# Altium PCB Morpheus_middle.PcbDoc (part 2 of 3)
Units mm, origin at the board's own origin, x right, y up, seen from the top; angles counter-clockwise.
Board outline 54.01 x 53.97 mm, 6 copper layers (Top Layer, Signal Layer 1, Signal Layer 2, GND, PWR, Bottom Layer), stack 0.657 mm thick; 151 components, 110 nets, 517 pads, 447 vias.
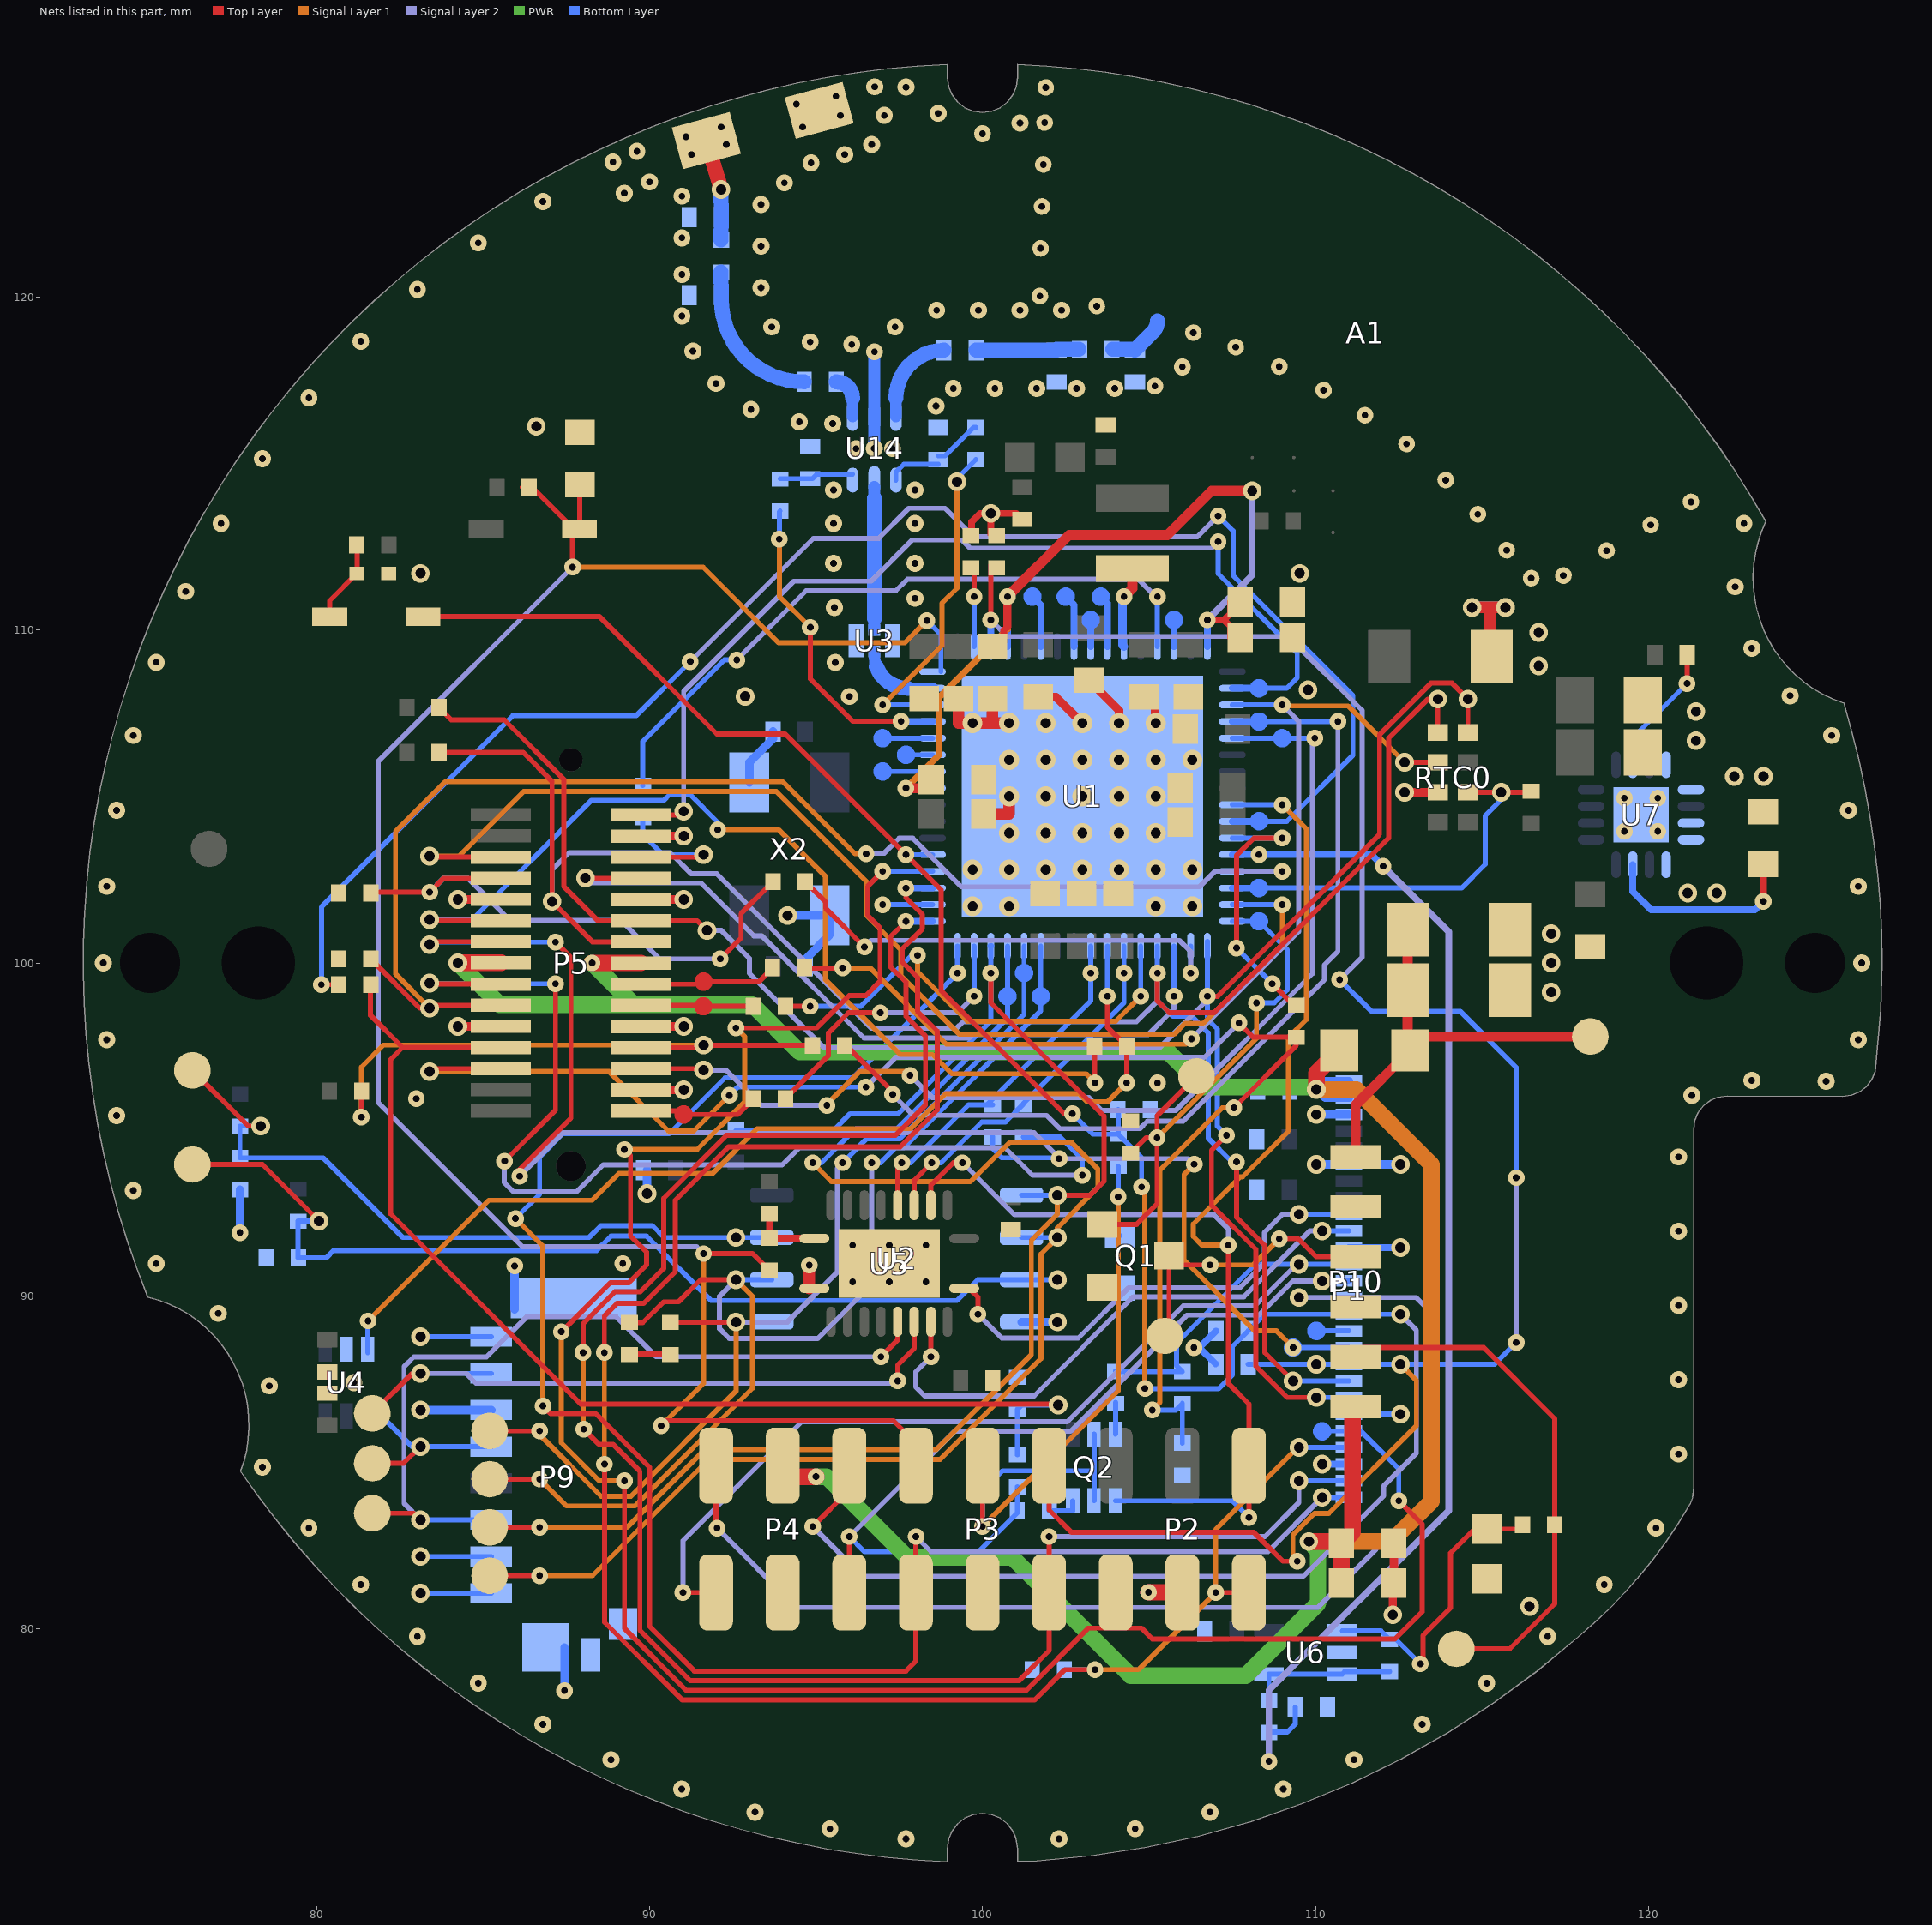
[diagram p6: the nets of this part, all layers, seen from the top]

## Via types
v1: diameter 0.559, hole 0.305, Top Layer to Bottom Layer, 105 vias
v2: diameter 0.5, hole 0.2, Top Layer to Bottom Layer, 104 vias
v3: diameter 0.5, hole 0.2, Top Layer to Bottom Layer, tented both sides, 66 vias
v4: diameter 0.51, hole 0.2, Top Layer to Bottom Layer, tented both sides, 64 vias
v5: diameter 0.51, hole 0.2, Top Layer to Bottom Layer, 58 vias
v6: diameter 0.6, hole 0.3, Top Layer to Bottom Layer, 33 vias
v7: diameter 0.559, hole 0.305, Top Layer to Bottom Layer, tented both sides, 16 vias
v8: diameter 0.559, hole 0.305, Top Layer to Bottom Layer, tented bottom, 1 vias

## Nets (pads, with @x,y where several pads share a name; then routed paths per layer and width w, separated by ;. In a path a pad name is that pad's centre, name@x,y a point inside that pad or via, vN(x,y) a via of type N, cw(c..) or ccw(c..) an arc to the next point about the centre after c; other vN are vias at no path point) (continued)
5V: C5.2 C6.2 C30.1 P1.1 P1.2 P4.4 P5.15 P5.16 P10.6 R8.2 | length 83.1
  Top Layer w0.5: v1(84.25,100.002) P5.16@85.54,100.002 ; v2(88.275,100) P5.15@89.74,100 ; P4.4@94,84.905 94.33,84.575 v3(95,84.575) ; v7(109.8,82.625) 110.732,82.625 C6.2@110.777,82.58 ; v1(110.025,96.2) 110.025,96.692 R8.2@110.708,97.375 ; C5.2@110.777,81.38 C6.2@110.777,82.58 ; P10.6@111.2,86.675 111.2,86.517 111.115,86.431 111.115,82.917 C6.2@110.777,82.58
  PWR w0.5: v1(84.25,100.002) 85.502,98.75 89.525,98.75 ; v2(88.275,100) 89.525,98.75 ; v3(95,84.575) 95.316,84.575 97.741,82.15 100.891,82.15 104.441,78.6 107.909,78.6 110.075,80.766 110.075,82.35 v7(109.8,82.625) ; v1(110.025,96.2) 109.95,96.275 106.631,96.275 105.581,97.325 94.51,97.325 93.085,98.75 89.525,98.75
  Signal Layer 1 w0.5: v7(109.8,82.625) 112.271,82.625 113.479,83.833 113.479,93.946 111.225,96.2 v1(110.025,96.2)
  Bottom Layer w0.25: C30.1@109.125,96.2 v1(110.025,96.2) ; P1.2@111,95.95 110.295,95.95 110.045,96.2 v1(110.025,96.2) ; P1.1@111,96.45 110.275,96.45 v1(110.025,96.2)
ANA2_SW: U1.46 | length 1.4
  Bottom Layer w0.2: U1.46@105.75,109.5 105.75,110.3
  Bottom Layer w0.35: 105.85,110.3 ccw(c105.75,110.3) 105.85,110.3
ANT_DIV_CTL1: C58.2 R58.2 U14.6 | length 2.2
  Bottom Layer w0.15: R58.2@93.925,114.542 C58.2@94.825,114.542 94.892,114.542 95.025,114.675 U14.6@96.1,114.675
ANT_DIV_CTL2: C59.2 R59.2 U14.4 | length 3.1
  Bottom Layer w0.15: U14.4@97.4,114.5 97.4,114.74 97.636,114.975 C59.2@98.675,114.975 ; C59.2@98.675,115.225 98.875,115.225 99.733,116.083 R59.2@99.8,116.083
CC_3200_PIN18: U1.18 | length 1.5
  Bottom Layer w0.15: v2(97,101.75) U1.18@98.5,101.75
CCU_ANT1: R58.1 U1.29 | length 9.6
  Top Layer w0.15: v3(94.83,110.08) 94.83,108.531 96.105,107.255 v2(97.555,107.255)
  Signal Layer 1 w0.15: v3(93.9,112.725) 93.9,111.01 v3(94.83,110.08)
  Bottom Layer w0.15: v3(93.9,112.725) 93.9,113.542 R58.1@93.925,113.567
  Bottom Layer w0.2: v2(97.555,107.255) 97.56,107.25 U1.29@98.5,107.25
CCU_ANT2: R59.1 U1.30 | length 10
  Signal Layer 1 w0.15: v2(97,107.75) 98.78,109.53 98.78,110.8 99.233,111.253 v1(99.233,114.45)
  Bottom Layer w0.15: v2(97,107.75) U1.30@98.5,107.75 ; v1(99.233,114.45) 99.233,114.55 R59.1@99.8,115.117
CCU_CLK: P5.20 R4.1 | length 30.3
  Top Layer w0.15: v1(83.4,101.3) 83.428,101.272 P5.20@85.54,101.272 ; v2@103.375,96.41 R4.1@103.375,97.502
  Signal Layer 1 w0.15: v2(92.05,104) 93.885,104 95.275,102.61 95.275,99.502 97.527,97.25 98.5,97.25 99.079,96.671 103.113,96.671 v2(103.38,96.405)
  Bottom Layer w0.15: v1(83.4,101.3) 84.671,101.3 88.256,104.885 90.435,104.885 90.594,105.044 91.23,105.044 92.05,104.224 v2(92.05,104)
CCU_CMD: P1.17 P5.18 R3.1 | length 47.2
  Top Layer w0.15: v1(83.4,100.55) 83.487,100.637 P5.18@85.54,100.637 ; v2(86.103,93.597) 86.103,93.803 87.64,95.34 87.64,100.16 v2(87.175,100.625)
  Signal Layer 1 w0.15: v2(106.355,93.955) 106.355,93.953 106.05,93.648 106.05,91.079 108.179,88.95 108.827,88.95 109.327,88.45 v2(109.325,88.45)
  Signal Layer 2 w0.15: v2(86.103,93.597) 87.405,94.9 101.55,94.9 102.3,94.15 v3(102.3,94.125) 106.185,94.125 v2(106.355,93.955)
  Bottom Layer w0.15: v1(83.4,100.55) 83.475,100.625 v2(87.175,100.625) ; R3.1@100.3,94.783 100.3,94.431 100.581,94.15 102.275,94.15 v3(102.3,94.125) ; v2(109.325,88.45) 109.425,88.45 P1.17@111,88.45
  Bottom Layer w0.35: v2@109.425,88.45 ccw(c109.325,88.45) v2@109.425,88.45
CCU_DAT: P5.14 R2.1 | length 33.4
  Top Layer w0.15: v1(83.4,99.395) 83.428,99.367 P5.14@85.54,99.367 ; v2(85.65,94.05) 87.175,95.575 v2(87.175,99.375)
  Signal Layer 2 w0.15: v2(85.65,94.05) 85.638,94.038 85.638,93.405 85.91,93.132 87.813,93.132 88.615,93.935 93.985,93.935 94.5,94.45 100.675,94.45 101.5,93.625 v3(103,93.625)
  Bottom Layer w0.15: v1(83.4,99.395) 83.42,99.375 v2(87.175,99.375) ; R2.1@101.225,94.775 102.333,94.775 103,94.108 v3(103,93.625)
CCU_RXD: P5.6 R27.2 R62.1 R63.2 | length 45.8
  Top Layer w0.15: v1(83.4,96.74) 83.487,96.827 P5.6@85.54,96.827 ; v2(107.55,95.65) 109.425,97.525 R27.2@109.425,97.767 109.425,97.775 108.125,97.775 v2(107.7,98.2)
  Signal Layer 1 w0.15: v1(83.4,96.74) 88.785,96.74 90.569,94.956 91.331,94.956 v2(92.4,96.025) ; v3(105.1,86.575) 105.325,86.8 105.325,93.778 107.197,95.65 v2(107.55,95.65)
  Signal Layer 2 w0.15: v2(96.5,96.275) 97.39,97.165 106.665,97.165 v2(107.7,98.2)
  Bottom Layer w0.15: v2(92.4,96.025) 92.65,96.275 v2(96.5,96.275) ; v3(105.1,86.575) 105.808,86.575 R62.1@106,86.767 ; R63.2@106,85.575 R62.1@106,86.767 ; R62.1@106,86.775 R62.1@106,86.767
CCU_TXD: P5.8 R64.1 R65.2 R70.2 | length 35.5
  Top Layer w0.15: R70.2@81.625,99.35 81.625,98.425 82.588,97.462 ; P5.8@85.54,97.462 82.588,97.462 ; v7(102.275,86.725) 102.245,86.755 87.937,86.755 82.225,92.467 82.225,97.099 82.588,97.462
  Bottom Layer w0.15: R64.1@101.05,85.225 R65.2@101.05,86.6 ; R65.2@101.05,86.592 101.183,86.725 v7(102.275,86.725)
DCDC_ANA_SW: U1.38 | length 2.2
  Bottom Layer w0.2: 101.5,111 101.75,110.75 U1.38@101.75,109.5
  Bottom Layer w0.35: 101.6,111 ccw(c101.5,111) 101.6,111
DCDC_DIG_SW: L3.2 U1.43 | length 2.5
  Top Layer w0.3: v2(104.25,111) 104.5,111.25 L3.2@104.5,111.85
  Bottom Layer w0.254: U1.43@104.25,109.5 104.204,109.546 104.204,110.954 v2(104.25,111)
DCDC_PA_OUT: U1.42 | length 2.2
  Bottom Layer w0.2: 103.55,111 103.75,110.8 U1.42@103.75,109.5
  Bottom Layer w0.35: 103.65,111 ccw(c103.55,111) 103.65,111
DCDC_PA_SW_N: U1.41 | length 1.4
  Bottom Layer w0.2: U1.41@103.25,109.5 103.25,110.25 103.3,110.3
  Bottom Layer w0.35: 103.35,110.3 ccw(c103.25,110.3) 103.35,110.3
DCDC_PA_SW_P: U1.40 | length 2.3
  Bottom Layer w0.2: 102.5,111 102.75,110.75 U1.40@102.75,109.5 U1.40@102.769,109.519
  Bottom Layer w0.35: 102.6,111 ccw(c102.5,111) 102.6,111
DUST_LED: P10.3 Q1.3 TP2.1 | length 8.7
  Top Layer w0.15: TP2.1@105.475,88.8 105.6,88.925 Q1.3@105.6,91.2 105.868,90.932 v3(106.833,90.932) ; v2(108.911,91.718) 109.482,91.718 110.025,91.175 P10.3@111.2,91.175
  Signal Layer 1 w0.15: v3(106.833,90.932) 108.126,90.932 v2(108.911,91.718)
DUST_OPAMP_IN+: R10.1 R11.2 R15.1 U6.1 | length 9
  Top Layer w0.15: v3(113.15,78.95) 113.225,79.025 113.225,79.803 114.056,80.634 114.056,82.281 114.774,82.999 R10.1@115.15,82.999 116.092,82.999 R11.2@116.217,83.125
  Bottom Layer w0.15: U6.1@110.8,79.943 111.966,79.943 R15.1@112.226,79.683 112.417,79.683 v3(113.15,78.95)
DUST_OPAMP_IN-: R15.2 R19.1 U6.3 U6.4 | length 4.4
  Bottom Layer w0.15: R19.1@108.6,77.858 108.6,78.642 U6.3@110.8,78.643 110.875,78.717 R15.2@112.226,78.717
DUST_OUTPUT: P10.5 R11.1 TP1.1 | length 16.1
  Top Layer w0.15: P10.5@111.2,88.175 111.475,88.45 115.05,88.45 117.183,86.317 R11.1@117.183,83.125 117.183,80.755 115.828,79.4 TP1.1@114.225,79.4
DUST_PWM: Q1.1 R80.2 TP9.1 U1.64 | length 17.4
  Top Layer w0.15: Q1.1@103.6,92.15 104.625,92.15 105.238,92.763 v2(105.238,94.75) ; R80.2@104.45,94.292 104.908,94.75 v2(105.238,94.75) ; TP9.1@106.425,96.6 105.238,95.413 v2(105.238,94.75)
  Signal Layer 1 w0.15: v2(105.238,94.75) 108.225,97.737 v2(108.225,98.801)
  Bottom Layer w0.15: U1.64@107.5,101.25 108.3,101.25 109.15,100.4 109.15,99.189 108.762,98.801 v2(108.225,98.801)
  Bottom Layer w0.35: 108.4,101.25 ccw(c108.3,101.25) 108.4,101.25
DUST_SENSE: C11.2 R19.2 U1.60 | length 36.9
  Signal Layer 2 w0.2: v3(108.6,76.025) 108.6,78.155 114,83.555 114,100.935 v2(112.03,102.905)
  Bottom Layer w0.15: v3(108.6,76.025) R19.2@108.6,76.892 108.608,76.9 109.15,76.9 109.392,77.142 C11.2@109.392,77.65
  Bottom Layer w0.2: U1.60@107.5,103.25 v2(108.3,103.25) 111.685,103.25 v2(112.03,102.905)
DUST_VLED: C2.2 C28.2 P10.1 R8.1 TP5.1 | length 13.2
  Top Layer w0.3: P10.1@111.2,94.175 111.2,95.733 R8.1@112.842,97.375 R8.1@112.763,97.454 ; C28.2@112.763,101 C2.2@112.763,99.182 R8.1@112.763,97.454 ; TP5.1@118.25,97.792 113.102,97.792 R8.1@112.763,97.454
EIFA_SIG1: C8.2 C46.1 R26.1 | length 4.7
  Bottom Layer w0.45: R26.1@92.15,120.742 C46.1@92.158,120.05 92.158,119.935 ccw(c94.642,119.935) C8.2@94.642,117.45
EIFA_SIG2: A2.1 C47.1 R26.2 | length 3.1
  Top Layer w0.45: A2.1@91.71,124.697 v1(92.15,123.225)
  Bottom Layer w0.45: R26.2@92.15,121.708 C47.1@92.158,122.4 v1(92.15,123.225)
  other v4: 91.262,124.275 92.306,124.575 91.1,124.813 92.15,125.1
EN_SIO: C61.1 P3.4 Q2.2 Q2.5 R61.2 | length 22.2
  Top Layer w0.15: v3(100,83.075) P3.4@100,84.905
  Signal Layer 1 w0.15: v3(100,83.075) 104.075,87.15 v3(104.075,92.975)
  Bottom Layer w0.15: v3(100,83.075) 100,84.15 100.6,84.75 103.35,84.75 ; Q2.2@103.35,83.85 Q2.5@103.35,85.85 ; R61.2@104.075,93.892 v3(104.075,92.975) 104.075,91.862 C61.1@104.125,91.812
FFC_USB_RXD: P1.10 U5.18 | length 17.2
  Top Layer w0.15: v3(98.45,88.175) U5.18@98.45,89.075
  Signal Layer 2 w0.15: v3(98.45,88.175) 98,87.725 98,87.264 98.264,87 101.553,87 104.528,89.975 107.847,89.975 109.822,91.95 v1(110.2,91.95)
  Bottom Layer w0.15: v1(110.2,91.95) P1.10@111,91.95
FFC_USB_TXD: P1.9 U5.20 | length 14.4
  Top Layer w0.15: U5.20@99.6,90.225 99.863,89.962 v3(99.863,89.45)
  Signal Layer 2 w0.15: v3(99.863,89.45) 100.577,88.736 102.878,88.736 104.392,90.25 107.733,90.25 108.461,90.978 108.461,91.904 109.007,92.45 v1(109.5,92.45)
  Bottom Layer w0.15: v1(109.5,92.45) P1.9@111,92.45
FLASH_RESET: R24.2 R25.1 TP15.1 U2.7 | length 21.6
  Top Layer w0.15: TP15.1@76.275,96.775 77.95,95.1 v1(78.325,95.1)
  Bottom Layer w0.15: v1(78.325,95.1) 77.7,95.1 77.7,94.15 80.2,94.15 82.595,91.755 88.184,91.755 88.539,92.11 90.095,92.11 90.45,91.755 v1(92.6,91.755) U2.7@93.675,91.755
FLASH_WP#: R22.2 R23.1 TP12.1 U2.3 | length 30.4
  Top Layer w0.15: TP12.1@76.275,93.95 78.375,93.95 v1(80.075,92.25)
  Bottom Layer w0.15: v1(80.075,92.25) 79.45,92.25 79.45,91.15 80.3,91.15 80.515,91.365 88.415,91.365 88.845,91.795 89.915,91.795 91.85,89.86 99.235,89.86 99.86,90.485 U2.3@101.175,90.485 v1(102.25,90.485)
GND: A1.2 A2.2 C1.1 C2.1 C3.1 C4.1 C5.1 C6.1 C7.1 C9.1 C11.1 C12.1 C13.1 C14.1 C15.1 C16.1 C17.1 C18.1 C19.1 C20.1 C21.1 C22.1 C23.1 C24.2 C25.1 C26.1 C27.1 C28.1 C29.1 C30.2 C31.2 C32.2 C33.2 C34.2 C35.1 C36.1 C37.1 C38.1 C39.1 C40.1 C42.1 C43.1 C44.1 C45.1 C46.2 C47.2 C48.2 C49.2 C58.1 C59.1 C61.2 C83.1 C84.1 P1.3 P1.6 P1.11 P1.21 P1.24 P2.3 P3.3 P4.3 P5.3 P5.9 P5.10 P5.21 P5.22 P5.27 P9.6 P9.G1 P9.G2 P10.2 P10.4 Q1.2 R5.1 R6.1 R7.1 R10.2 R17.1 R18.1 R22.1 R24.1 R31.1 R34.2 R35.2 R63.1 R65.1 R67.1 R80.1 RTC0.3 U1.65 U2.4 U3.2 U3.4 U4.2 U5.11 U5.21 U6.2 U7.4 U7.5 U7.7 U7.8 U7.9 U7.17 U14.2 X2.2 X2.4 | length 54.6
  Top Layer w0.2: R17.1@89.4,88.25 R18.1@90.625,88.25 ; 99.275,107.201 99.276,107.2 ; R6.1@99.675,112.825 99.675,113.247 99.928,113.5 v1(100.25,113.5) ; R7.1@100.3,112.825 100.25,112.875 v1(100.25,113.5) ; C4.1@101.2,113.317 101.017,113.5 v1(100.25,113.5)
  Top Layer w0.25: C15.1@103.2,108.488 104.1,107.588 v6(104.1,107.2) ; C16.1@105.175,107.988 105.175,107.225 v6(105.2,107.2)
  Top Layer w0.254: v1(84.25,98.097) P5.10@85.54,98.097 ; v1(84.25,101.907) P5.22@85.54,101.907 ; P5.3@89.74,96.19 v1(91.03,96.19) ; P5.9@89.74,98.095 v1(91.03,98.095) ; P5.21@89.74,101.905 v1(91.03,101.905) ; P5.27@89.74,103.81 v1(91.03,103.81) ; C17.1@101.675,107.988 102.212,107.988 v6(103,107.2) ; v7(112.319,80.425) 112.319,81.348 C5.1@112.352,81.38 C6.1@112.352,82.58 ; v1(112.675,105.125) RTC0.3@113.675,105.125
  Top Layer w0.35: U5.11@94.8,90.225 v3(94.8,90.925) ; 99.275,107.201 C36.1@99.275,107.938 ; 99.276,107.2 v6(99.7,107.2) 100.3,107.2 ; C23.1@100.037,104.475 100.8,104.475 v6(100.8,105) ; C12.1@100.3,107.938 100.3,107.2 ; v6(100.8,107.2) 100.3,107.2 ; v1(114.7,110.675) v1(115.7,110.675) ; C43.1@115.225,109.2 115.225,110.675
  Top Layer w0.5: v3(104.98,81.1) P2.3@106,81.1
  Bottom Layer w0.2: v3(106.35,88.45) v3@106.51,88.45 ; C34.2@107,87.96 v3@106.51,88.45 ; C33.2@107.01,88.95 v3@106.51,88.45 ; v7(110.2,84.95) P1.24@111,84.95 ; P1.21@111,86.45 v1(112.55,86.45) ; P1.11@111,91.45 v1(112.55,91.45)
  Bottom Layer w0.25: v2(77.7,91.9) R24.1@77.7,93.2 ; v1(83.125,86.575) P9.6@85.25,86.575 ; P9.G1@85.95,89.6 v2(85.95,90.9) ; v2(87.45,78.15) P9.G2@87.45,79.45 ; v1(110.025,93.95) P1.6@111,93.95 111.493,93.95 111.907,93.95 v1(112.55,93.95) ; v1(110.025,95.45) P1.3@111,95.45
  Bottom Layer w0.254: v1(89.925,93.075) C3.1@89.925,93.775 ; X2.4@93,105.425 93,106.025 93.712,106.737 C25.1@93.712,106.95 ; v8(94.15,101.425) X2.2@95.4,101.425 95.4,100.83 94.725,100.155 C26.1@94.725,99.9 ; U2.4@101.175,89.215 v1(102.25,89.215)
  Bottom Layer w0.35: v4(96.75,115.45) v4@96.75,118.352 ; v1(114.7,110.675) 115.225,110.675 ; C7.1@115.287,109.189 115.225,109.251 115.225,110.675 ; v1(115.7,110.675) 115.225,110.675
  other v1: 117.075,99.125 117.075,100 117.075,100.875 121.175,102.1 122.05,102.1 122.575,105.6 123.45,105.6 121.425,106.675 121.425,107.55 109.775,108.2 116.7,108.925 116.7,109.925 109.525,111.7
  other v2: 96.1,90.425 97.2,90.425 98.3,90.425 89.2,90.975 96.1,91.525 97.2,91.525 98.3,91.525 83,95.925 105.25,96.398
  other v4: 81.125,87.4 96.004,108 95.575,109.025 95.55,110.675 97.975,110.95 95.525,112 97.975,112 95.525,113.2 97.975,113.2 95.525,114.2 97.975,114.2 96.202,115.443 97.294,115.443 95.5,116.2 94.5,116.25 93.05,116.625 98.6,116.725 99.125,117.25 100.375,117.25 101.625,117.25 102.825,117.25 103.975,117.25 105.175,117.325 92,117.4 106,117.9 91.3,118.375 96.757,118.352 96.075,118.575 94.825,118.65 93.675,119.1 97.375,119.1 90.975,119.425 98.625,119.6 99.875,119.6 101.125,119.6 102.375,119.6 93.35,120.275 90.975,120.675 93.35,121.525 90.975,121.775 93.35,122.775 90.975,123.025 89.245,123.118 94.05,123.425 90,123.45 94.85,124.025 88.9,124.05 95.858,124.275 89.625,124.375 96.675,124.575 100,124.9 94.6,125.1 101.125,125.225 95.731,125.45 97.051,125.45 98.667,125.512 94.413,125.789 95.6,126.025 96.76,126.31
  other v5: 97.699,73.701 102.301,73.701 95.416,74.001 104.584,74.001 93.167,74.5 106.833,74.5 90.971,75.192 109.029,75.192 88.843,76.074 111.157,76.074 86.8,77.137 113.2,77.137 84.858,78.374 115.142,78.374 83.03,79.776 116.97,79.776 81.332,81.332 118.668,81.332 79.776,83.03 120.224,83.03 78.374,84.858 120.9,85.255 78.587,87.3 120.9,87.485 77.05,89.475 120.9,89.715 75.192,90.971 120.9,91.945 74.5,93.167 120.9,94.175 74.001,95.416 121.3,96.025 125.33,96.45 123.1,96.475 73.701,97.699 126.299,97.699 73.6,100 126.4,100 73.701,102.301 126.299,102.301 74.001,104.584 125.999,104.584 74.5,106.833 125.5,106.833 124.25,108.025 75.192,109.029 123.1,109.45 76.074,111.157 122.6,111.3 77.137,113.2 122.863,113.2 78.374,115.142 79.776,116.97 81.332,118.668 83.03,120.224 84.858,121.626 86.8,122.863 97.699,126.299
  other v6: 99.7,101.7 100.8,101.7 105.2,101.7 106.3,101.7 99.7,102.8 100.8,102.8 101.9,102.8 103,102.8 104.1,102.8 105.2,102.8 106.3,102.8 100.8,103.9 101.9,103.9 103,103.9 104.1,103.9 105.2,103.9 101.9,105 103,105 104.1,105 105.2,105 100.8,106.1 101.9,106.1 103,106.1 104.1,106.1 105.2,106.1 106.3,106.1 101.9,107.2
  other v7: 116.425,80.675 92.872,108.005 83.125,111.7 86.601,116.115
GSPI_CLK: P5.11 R72.2 | length 4
  Top Layer w0.15: P5.11@89.74,98.73 91.585,98.73 91.615,98.7 R72.2@93.125,98.7
  Top Layer w0.35: 91.715,98.7 ccw(c91.615,98.7) 91.715,98.7
GSPI_CS1: P5.1 R73.2 | length 4.3
  Top Layer w0.15: P5.1@89.74,95.555 90.92,95.555 91.025,95.45 92.65,95.45 R73.2@93.125,95.925
  Top Layer w0.35: 91.125,95.45 ccw(c91.025,95.45) 91.125,95.45
GSPI_INT: P5.12 R34.1 U1.61 | length 40.9
  Top Layer w0.15: R34.1@81.625,100.125 83.105,98.645 v1(83.4,98.645) 83.487,98.732 P5.12@85.54,98.732
  Signal Layer 1 w0.15: v1(83.4,98.645) 82.375,99.67 82.375,103.95 83.865,105.44 94.01,105.44 96.17,103.28 v2(96.505,103.28)
  Signal Layer 2 w0.15: v2(96.505,103.28) 96.525,103.3 97.051,103.3 97.495,103.744 97.905,103.744 99.364,102.285 106.513,102.285 106.978,102.75 v2(109,102.75)
  Bottom Layer w0.15: U1.61@107.5,102.75 v2(109,102.75)
GSPI_MISO: P5.5 U1.53 | length 33.5
  Top Layer w0.15: P5.5@89.74,96.825 91.585,96.825 v1(91.625,96.785)
  Signal Layer 1 w0.15: v2(95.325,95.725) 95.325,95.758 96.307,96.74 97.71,96.74 v2(97.825,96.625)
  Signal Layer 2 w0.15: v1(91.625,96.785) 92.298,96.785 93.358,95.725 v2(95.325,95.725) ; v2(97.825,96.625) 98.495,95.955 103.195,95.955 103.575,95.575 105.808,95.575 109.91,99.677 109.91,106.685 v2(109.98,106.755)
  Bottom Layer w0.15: U1.53@107.5,106.75 109.975,106.75 v2(109.98,106.755)
  Bottom Layer w0.35: 109.1,106.75 ccw(c109,106.75) 109.1,106.75
GSPI_MOSI: P5.7 R32.1 R71.1 | length 18
  Top Layer w0.15: v2(81.35,95.375) R32.1@81.35,96.15 ; P5.7@89.74,97.46 91.55,97.46 v1(91.625,97.535) 91.635,97.525 R71.1@94.9,97.525
  Signal Layer 1 w0.15: v2(81.35,95.375) 81.35,96.875 82.01,97.535 v1(91.625,97.535)
I2C_SCL: P1.20 P5.19 R14.1 RTC0.8 U1.1 | length 61.6
  Top Layer w0.15: R14.1@83.675,107.675 84.05,107.3 85.641,107.3 87.425,105.516 87.425,102.3 88.455,101.27 91.433,101.27 v1(91.728,100.975) ; v2@106.95,99 107.061,99 111.921,103.86 111.921,106.86 113.465,108.404 114.096,108.404 v1(114.575,107.925) RTC0.8@114.575,106.925 ; v2(107.325,94.825) 106.875,94.375 106.875,92.728 108.205,91.399 108.205,87.892 109.147,86.95 v1(110.025,86.95)
  Signal Layer 2 w0.15: v1(91.728,100.975) 92.159,100.975 93,100.134 93,99.688 95.233,97.455 105.314,97.455 106.75,98.891 v2(106.75,99)
  Bottom Layer w0.15: U1.1@106.75,100.65 v2(106.75,99) 106.75,98.318 107.05,98.018 107.05,95.1 v2(107.325,94.825) ; v1(110.025,86.95) P1.20@111,86.95
I2C_SDA: P1.19 P5.17 R13.1 RTC0.1 U1.4 | length 65.4
  Top Layer w0.15: R13.1@83.683,106.325 86.206,106.325 87.075,105.456 v1(87.075,101.844) 88.284,100.635 P5.17@88.971,100.635 ; P5.17@89.695,100.68 P5.17@89.74,100.635 ; v2(105.25,99.7) 105.25,98.864 105.608,98.506 106.956,98.506 112.196,103.746 112.196,106.746 113.375,107.925 v1(113.675,107.925) RTC0.1@113.675,106.925 ; v2(107.625,94.025) 107.625,92.367 108.48,91.513 108.48,88.295 v1(109.325,87.45)
  Signal Layer 2 w0.15: v1(87.075,101.844) 87.075,102.8 87.585,103.31 90.622,103.31 91.258,102.675 92.027,102.675 96.667,98.035 99.218,98.035 99.418,98.235 104.622,98.235 105.25,98.864 v2(105.25,99.7)
  Bottom Layer w0.15: U1.4@105.25,100.5 v2(105.25,99.7) 105.25,98.864 105.706,98.408 106.271,98.408 106.775,97.904 106.775,94.739 107.489,94.025 v2(107.625,94.025) ; v1(109.325,87.45) P1.19@111,87.45
I2S_DIN: P5.25 R75.1 | length 4.5
  Top Layer w0.15: P5.25@89.74,103.175 91.55,103.175 v1(91.625,103.25)
  Bottom Layer w0.15: R75.1@89.8,104.341 89.8,103.85 90.4,103.25 v1(91.625,103.25)
I2S_DOUT: P5.29 U1.50 | length 30.8
  Top Layer w0.15: P5.29@89.74,104.445 90.92,104.445 v1(91.025,104.55)
  Signal Layer 2 w0.15: v1(91.025,104.55) 91.025,108.158 94.332,111.465 96.657,111.465 97.892,112.7 99.38,112.7 99.625,112.455 106.88,112.455 v2(107.075,112.65)
  Bottom Layer w0.15: v2(107.075,112.65) 107.075,111.692 109.45,109.317 109.45,108.564 109.136,108.25 108.3,108.25
  Bottom Layer w0.2: U1.50@107.5,108.25 108.3,108.25
  Bottom Layer w0.35: 108.4,108.25 ccw(c108.3,108.25) 108.4,108.25
I2S_FSYNC: P5.26 U1.63 | length 36.4
  Top Layer w0.15: v1(83.4,103.205) 83.428,103.177 P5.26@85.54,103.177
  Signal Layer 1 w0.15: v1(83.4,103.205) 84.28,103.205 86.225,105.15 93.807,105.15 96.505,102.453 96.505,101.431 97.547,100.389 97.547,99.618 99.305,97.86 105.752,97.86 106.082,98.19 106.639,98.19 109,100.551 v2(109,101.75)
  Bottom Layer w0.15: U1.63@107.5,101.75 v2(109,101.75)
I2S_SCLK: P5.23 U1.3 | length 23.6
  Top Layer w0.15: v1(88.075,102.55) 88.085,102.54 P5.23@89.74,102.54
  Signal Layer 2 w0.15: v1(88.075,102.55) 88.225,102.4 91.548,102.4 93.133,100.815 93.371,100.815 96.441,97.745 99.593,97.745 99.694,97.846 104.971,97.846 105.75,98.625 v2(105.75,99)
  Bottom Layer w0.15: v2(105.75,99) U1.3@105.75,100.5
JTAG_TCK: P1.23 P2.5 R31.2 U1.19 | length 60.9
  Top Layer w0.15: v3(88.645,88.3) 88.645,89.395 89.024,89.774 89.824,89.774 90.775,90.725 90.775,92.875 92.375,94.475 97.53,94.475 98.64,95.585 98.64,97.952 98.05,98.542 98.05,99.567 97.585,100.032 97.585,100.418 98.194,101.027 98.194,101.455 97.7,101.949 v2(97.7,102.25) ; v3(88.65,84.95) 88.65,80.2 90.985,77.865 101.565,77.865 102.475,78.775 v3(103.38,78.775) ; v3(107.004,81.095) P2.5@108,81.095
  Signal Layer 1 w0.15: v3@88.645,84.95 v3(88.645,88.3) ; v3(103.38,78.775) 104.684,78.775 v3(107.004,81.095) 107.004,82.99 109.464,85.45 v7(109.5,85.45)
  Bottom Layer w0.15: R31.2@102.464,78.775 v3(103.38,78.775) ; v7(109.5,85.45) P1.23@111,85.45
  Bottom Layer w0.2: v2(97.7,102.25) U1.19@98.5,102.25
JTAG_TDI: P1.26 P3.1 U1.16 | length 58.8
  Top Layer w0.15: v3(86.8,86.7) 87.035,86.465 88.395,86.465 90.005,84.855 90.005,80.075 91.345,78.735 97.703,78.735 98,79.032 P3.1@98,81.095 v3(98,82.775)
  Signal Layer 1 w0.15: v2(85.975,92.325) 86.8,91.5 v3(86.8,86.7)
  Signal Layer 2 w0.15: v3(98,82.775) 98.45,82.325 108.575,82.325 v7(110.2,83.95)
  Bottom Layer w0.15: v2(85.975,92.325) 86.7,93.05 86.7,94.175 87.4,94.875 90.592,94.875 92.267,96.55 96.1,96.55 v2(99.25,99.7) U1.16@99.25,100.5 ; v7(110.2,83.95) P1.26@111,83.95
JTAG_TDO: P1.25 P3.5 U1.17 | length 57.9
  Top Layer w0.15: v3(88.005,88.3) 88.005,89.165 88.965,90.125 89.725,90.125 90.425,90.825 90.425,92.935 92.315,94.825 97.385,94.825 98.29,95.73 98.29,97.807 97.7,98.397 97.7,99.422 97.235,99.887 97.235,100.785 v2(97.7,101.25) ; v3(88.025,86) 88.475,85.55 88.9,85.55 89.715,84.735 89.715,79.955 91.225,78.445 101.095,78.445 102,79.35 P3.5@102,81.095 ; P3.5@102,81.3 v3(102,82.775)
  Signal Layer 1 w0.15: v3(88.005,88.3) 88.005,86.02 v3(88.025,86)
  Signal Layer 2 w0.15: v3(102,82.775) 108.48,82.775 109.5,83.795 v7(109.5,84.45)
  Bottom Layer w0.15: v7(109.5,84.45) P1.25@111,84.45
  Bottom Layer w0.2: v2(97.7,101.25) U1.17@98.5,101.25
JTAG_TMS: P1.22 P2.1 U1.20 | length 67.7
  Top Layer w0.15: v3@87.355,88.925 88.83,90.4 89.383,90.4 89.915,90.932 89.915,91.318 89.431,91.802 89.431,94.214 v2(89.245,94.4) ; v3(89.25,84.45) 89.25,80.01 91.105,78.155 101.311,78.155 103.181,80.025 104.773,80.025 105.1,79.698 112.383,79.698 113.2,80.516 113.2,83.15 v3(112.5,83.85) ; v2(92.6,98.05) 95.02,98.05 95.995,99.025 96.497,99.025 96.925,99.453 96.925,101.056 96.55,101.431 96.55,102.3 v2(97,102.75)
  Signal Layer 1 w0.15: v3(87.35,88.925) 87.35,85.592 88.492,84.45 v3(89.25,84.45) ; v2(89.245,94.4) 91.433,94.4 92.865,95.832 92.865,97.785 v2(92.6,98.05)
  Bottom Layer w0.15: v2(97,102.75) U1.20@98.5,102.75 ; 110.3,85.936 110.314,85.95 P1.22@111,85.95 111.358,85.95 112.5,84.808 v3(112.5,83.85)
  Bottom Layer w0.35: 110.3,85.936 ccw(c110.2,85.936) 110.3,85.936
LDO_IN: C12.2 C13.2 C18.2 C21.2 NT1.2 U1.25 U1.36 U1.48 | length 27.1
  Top Layer w0.2: C12.2@100.639,109.65 100.639,109.989 100.75,110.1 ; v2(106.75,110.3) 107.25,110.3 ; C13.2@107.45,109.775 107.45,110.1 107.25,110.3 ; C18.2@107.45,110.85 107.45,110.5 107.25,110.3
  Top Layer w0.25: 100.75,110.1 v2(100.75,111)
  Top Layer w0.3: v2(97.7,105.25) C21.2@98.425,105.25 ; v2(100.75,111) 102.6,112.85 105.55,112.85 106.875,114.175 v1(108.1,114.175)
  Signal Layer 1 w0.2: v2(97.7,105.25) 98.687,106.238 98.687,107.962 100.75,110.025 v2(100.75,111)
  Signal Layer 2 w0.2: v2(106.75,110.3) 108.1,111.65 v1(108.1,114.175)
  Bottom Layer w0.2: v2(97.7,105.25) U1.25@98.5,105.25 ; U1.36@100.75,109.5 v2(100.75,111) ; U1.48@106.75,109.5 v2(106.75,110.3) v2@106.769,110.319
MCLK_OUT: P5.24 R20.2 R35.1 | length 17
  Top Layer w0.15: R35.1@81.633,102.125 v2(83.4,102.125) 83.817,102.542 P5.24@85.54,102.542 ; v2(92.125,100.125) 92.75,100.75 92.75,101.484 R20.2@93.709,102.444
  Signal Layer 2 w0.15: v2(83.4,102.125) 83.817,102.542 84.55,102.542 85.82,101.272 89.151,101.272 90.298,100.125 v2(92.125,100.125)
NC_P26: U1.26 | length 2.1
  Bottom Layer w0.15: 97,105.75 U1.26@98.5,105.75
  Bottom Layer w0.35: 97.1,105.75 ccw(c97,105.75) 97.1,105.75
NC_P27: U1.27 | length 1.4
  Bottom Layer w0.15: 97.7,106.25 U1.27@98.5,106.25
  Bottom Layer w0.35: 97.8,106.25 ccw(c97.7,106.25) 97.8,106.25
NC_P28: U1.28 | length 2.1
  Bottom Layer w0.15: 97,106.75 U1.28@98.5,106.75
  Bottom Layer w0.35: 97.1,106.75 ccw(c97,106.75) 97.1,106.75
NetC41_1: C41.1 U7.2 | length 4
  Top Layer w0.15: v2(121.158,108.392) C41.1@121.158,109.25
  Bottom Layer w0.15: U7.2@119.525,105.95 119.525,106.76 v2(121.158,108.392)
NetC42_2: C42.2 U7.11 | length 6.2
  Top Layer w0.2: v2(123.45,101.85) C42.2@123.45,102.963
  Bottom Layer w0.2: U7.11@119.525,102.95 119.525,102.148 120.077,101.596 123.196,101.596 v2(123.45,101.85)
NetD1_1: D1.1 R66.1 R67.2 | length 2.5
  Top Layer w0.15: D1.1@80.4,110.4 80.4,110.882 R67.2@81.219,111.701 R66.1@81.219,112.551
NetP5_13: P5.13 R28.2 | length 4.8
  Top Layer w0.15: P5.13@89.74,99.365 91.55,99.365 91.625,99.44 93.29,99.44 R28.2@93.7,99.85
  Top Layer w0.35: 91.725,99.44 ccw(c91.625,99.44) 91.725,99.44
NetQ2_3: Q2.3 R30.2 | length 1
  Bottom Layer w0.15: R30.2@102,83.55 102.71,83.55 Q2.3@102.71,83.85
NetQ2_6: Q2.6 R29.2 | length 1
  Bottom Layer w0.15: Q2.6@103.99,85.85 104,85.86 R29.2@104,86.8
NetR20_1: R20.1 U1.2 | length 14.2
  Top Layer w0.15: R20.1@94.674,102.444 95.291,101.827 95.291,101.644 v2(96.455,100.48)
  Signal Layer 2 w0.15: v2(96.455,100.48) 96.65,100.675 105.911,100.675 106.25,100.336 v2(106.25,99.7)
  Bottom Layer w0.15: v2(106.25,99.7) U1.2@106.25,100.5
NetR21_2: R21.2 R33.2 U5.10 | length 1.9
  Top Layer w0.2: R21.2@93.6,92.467 R33.2@93.6,91.733 94.792,91.733 U5.10@94.8,91.725
NetR27_1: R27.1 U1.59 | length 8.4
  Top Layer w0.15: v2(107.625,100.45) 107.625,103.225 108.15,103.75 v2(109,103.75) ; v2(108.7,99.375) 109.35,98.725 R27.1@109.425,98.725
  Bottom Layer w0.15: U1.59@107.5,103.75 v2(109,103.75) ; v2(107.625,100.45) v2(108.7,99.375)
NetR70_1: R70.1 U1.58 | length 49.3
  Top Layer w0.15: v2(80.15,99.35) R70.1@80.675,99.35
  Signal Layer 2 w0.15: v3(91.225,109.05) 94.92,112.745 96.877,112.745 97.787,113.655 98.875,113.655 99.73,112.8 106.45,112.8 v2(107.075,113.425)
  Bottom Layer w0.15: v2(80.15,99.35) 80.15,101.678 85.897,107.425 89.6,107.425 v3(91.225,109.05) ; v2(107.075,113.425) 107.525,112.975 107.525,111.631 111.125,108.031 111.125,106.239 109.136,104.25 108.3,104.25
  Bottom Layer w0.2: U1.58@107.5,104.25 108.3,104.25
  Bottom Layer w0.35: 108.406,104.256 ccw(c108.306,104.256) 108.406,104.256
NetR71_2: R71.2 U1.52 | length 29.1
  Top Layer w0.15: R71.2@95.85,97.525 95.908,97.525 97.3,96.133 v2(97.3,96.05)
  Signal Layer 2 w0.15: v2(97.3,96.05) 97.925,95.425 101.925,95.425 102.325,95.025 104.725,95.025 104.95,95.25 106.025,95.25 110.26,99.485 110.26,99.935 110.675,100.35 v2(110.675,107.25)
  Bottom Layer w0.15: 108.3,107.25 110.6,107.25 v2(110.675,107.25)
  Bottom Layer w0.2: U1.52@107.5,107.25 108.3,107.25
  Bottom Layer w0.35: 108.4,107.25 ccw(c108.3,107.25) 108.4,107.25
NetR72_1: R72.1 U1.5 | length 14.2
  Top Layer w0.15: R72.1@94.075,98.7 v2(94.825,98.7)
  Signal Layer 1 w0.15: v2(98.05,100.225) 98.05,99.732 98.064,99.732 99.547,98.25 104,98.25 v2(104.75,99)
  Bottom Layer w0.15: v2(94.825,98.7) 96.345,98.7 97.87,100.225 v2(98.05,100.225) ; v2(104.75,99) U1.5@104.75,100.5
NetR73_1: R73.1 U1.15 | length 8.8
  Top Layer w0.15: R73.1@94.075,95.925 95.375,97.225 95.375,97.9 95.98,98.505 v2(96.93,98.505)
  Signal Layer 2 w0.15: v2(96.93,98.505) 99.255,98.505 v2(99.75,99)
  Bottom Layer w0.15: v2(99.75,99) U1.15@99.75,100.5
NetR75_2: R75.2 U1.45 | length 20.5
  Signal Layer 2 w0.15: v3(92.625,109.1) 94.7,111.175 97.395,111.175 97.745,111.525 104.674,111.525 105.199,111 v2(105.25,111)
  Bottom Layer w0.15: R75.2@89.8,105.325 89.8,106.65 92.25,109.1 v3(92.625,109.1) ; U1.45@105.25,109.5 v2(105.25,111)
NRESET: C1.2 D2.2 P3.2 R1.1 R33.1 U1.32 | length 65
  Top Layer w0.15: R1.1@86.176,114.285 86.476,114.285 87.726,113.035 D2.2@87.901,113.035 ; v3(87.687,111.885) 87.687,112.821 D2.2@87.901,113.035 ; C1.2@87.901,114.322 D2.2@87.901,113.035 ; v3(90.35,86.1) 90.498,86.248 97.327,86.248 98,85.575 P3.2@98,84.905 ; v2(91.626,91.271) 93.096,91.271 R33.1@93.6,90.767
  Signal Layer 1 w0.15: v3(87.687,111.885) 91.61,111.885 93.875,109.62 97.67,109.62 v2(98.33,110.28) ; v3(90.35,86.1) 91.626,87.376 v2(91.626,91.271)
  Signal Layer 2 w0.15: v3(87.687,111.885) 81.85,106.048 81.85,95.814 86.185,91.478 91.418,91.478 v2(91.626,91.271)
  Bottom Layer w0.15: v2(98.33,110.28) 98.75,109.86 U1.32@98.75,108.75
PIFA_SIG1: C10.2 C48.1 R9.1 | length 3.1
  Bottom Layer w0.45: C10.2@99.808,118.408 C48.1@102.225,118.408 ; C48.1@102.225,118.425 R9.1@102.893,118.425
PIFA_SIG2: A1.1 C49.1 R9.2 | length 1.8
  Bottom Layer w0.45: R9.2@103.907,118.425 C49.1@104.575,118.425 ; C49.1@104.575,118.408 105.114,118.947 ccw(c104.786,119.275) A1.1@105.25,119.275
RF_BG: U1.31 U3.1 | length 2.3
  Bottom Layer w0.35: U3.1@96.755,109.35 ccw(c97.75,109.25) 96.81,108.908 ; 97.875,108.25 U1.31@98.5,108.25
  Bottom Layer w0.45: 96.81,108.908 ccw(c97.75,109.25) 97.75,108.25
RF_OUT1: C8.1 U14.1 | length 1.3
  Bottom Layer w0.35: U14.1@96.098,116.412 96.098,116.962
  Bottom Layer w0.45: C8.1@95.61,117.45 cw(c95.61,116.962) 96.098,116.962
RF_OUT2: C10.1 U14.3 | length 2.8
  Bottom Layer w0.35: U14.3@97.402,116.412 97.402,116.962
  Bottom Layer w0.45: 97.402,116.962 cw(c98.84,116.962) 98.84,118.4 C10.1@98.842,118.4
RTC_CLK: R28.1 RTC0.2 U1.51 | length 31.1
  Top Layer w0.15: R28.1@94.65,99.85 v2(95.8,99.85) ; v1(112.675,106.025) RTC0.2@113.675,106.025
  Signal Layer 1 w0.15: v2(95.8,99.85) 96.625,99.85 98.915,97.56 106.11,97.56 v2(106.275,97.725) ; v2(109,107.75) 109.029,107.721 110.979,107.721 v1(112.675,106.025)
  Signal Layer 2 w0.15: v2(106.275,97.725) 109.494,100.944 109.494,107.256 v2(109,107.75)
  Bottom Layer w0.15: U1.51@107.5,107.75 v2(109,107.75)
RTC_INT_N: R81.1 RTC0.6 U1.62 | length 12.8
  Top Layer w0.15: RTC0.6@114.575,105.125 v1(115.575,105.125) 116.442,105.125 R81.1@116.474,105.158
  Bottom Layer w0.15: 108.3,102.25 114.386,102.25 115.096,102.959 115.096,104.424 115.575,104.903 v1(115.575,105.125)
  Bottom Layer w0.2: U1.62@107.5,102.25 108.3,102.25
  Bottom Layer w0.35: 108.4,102.25 ccw(c108.3,102.25) 108.4,102.25
SAW_FILTER_OUT: U3.3 U14.5 | length 4.3
  Bottom Layer w0.35: U3.3@96.75,110 96.75,110.35 ; 96.75,113.95 U14.5@96.75,114.3
  Bottom Layer w0.45: 96.75,110.35 96.75,113.95
SDCARD_DAT1: P9.8 | length 2.1
  Bottom Layer w0.15: v1(83.125,88.775) P9.8@85.25,88.775
SDCARD_DAT2: P9.1 | length 2.1
  Bottom Layer w0.15: v1(83.125,81.075) P9.1@85.25,81.075
SDCARD_DAT3: P9.2 | length 2.1
  Bottom Layer w0.15: v1(83.125,82.175) P9.2@85.25,82.175
SDCARD_G3: P9.G3
SDCARD_G4: P9.G4
SDHOST_CLK_1.8: R4.2 U1.7 U4.3 | length 31.2
  Top Layer w0.15: v2(103.75,99) 103.75,98.077 104.325,97.502 v2(104.325,96.4)
  Signal Layer 1 w0.15: v3(81.55,89.25) 85.175,92.875 88.275,92.875 89.075,93.675 91.887,93.675 93.237,95.025 97.844,95.025 98.895,96.076 102.894,96.076 103.133,95.837 103.762,95.837 v2(104.325,96.4)
  Bottom Layer w0.15: U4.3@81.54,88.3 81.54,89.24 v3(81.55,89.25) ; v2(103.75,99) U1.7@103.75,100.5
SDHOST_CLK_3.3: P9.5 TP3.1 U4.4 | length 5.8
  Top Layer w0.15: TP3.1@81.675,84.975 82.616,84.975 83.116,85.475 v1(83.125,85.475)
  Bottom Layer w0.15: U4.4@81.49,86.35 82,86.35 82.875,85.475 v1(83.125,85.475) P9.5@85.25,85.475
SDHOST_CMD_1.8: R3.2 U1.8 U5.5 | length 10.7
  Top Layer w0.15: U5.5@97.45,92.875 97.45,93.875 v3(97.575,94)
  Bottom Layer w0.15: v3(97.575,94) 97.839,94 99.579,95.74 R3.2@100.127,95.74 ; R3.2@100.3,95.74 R3.2@100.127,95.74 ; U1.8@103.25,100.5 v2(103.25,99.7) 103.25,98.864 R3.2@100.127,95.74
SDHOST_CMD_3.3: P9.3 TP16.1 U5.16 | length 25
  Top Layer w0.15: TP16.1@81.675,83.475 82.925,83.475 v1(83.125,83.275) ; v3(96.95,88.175) 97.45,88.675 U5.16@97.45,89.075
  Signal Layer 2 w0.15: v1(83.125,83.275) 82.631,83.769 82.631,87.88 82.92,88.169 85.106,88.169 86.311,89.375 89,89.375 90.2,88.175 v3(96.95,88.175)
  Bottom Layer w0.15: v1(83.125,83.275) P9.3@85.25,83.275
SDHOST_DAT_1.8: R2.2 U1.6 U5.4 | length 10.8
  Top Layer w0.15: U5.4@97.95,92.875 97.95,93.475 v3(98.475,94)
  Bottom Layer w0.15: v3(98.475,94) 98.759,94 99.982,95.223 100.69,95.223 101.225,95.758 101.225,95.776 104.25,98.801 v2(104.25,99.7) U1.6@104.25,100.5
SDHOST_DAT_3.3: P9.7 TP10.1 U5.17 | length 20.4
  Top Layer w0.15: TP10.1@81.675,86.475 82.875,87.675 v1(83.125,87.675) ; v3(97.45,87.45) 97.45,87.925 97.95,88.425 U5.17@97.95,89.075
  Signal Layer 2 w0.15: v1(83.125,87.675) 84.5,87.675 84.792,87.383 97.383,87.383 v3(97.45,87.45)
  Bottom Layer w0.15: v1(83.125,87.675) P9.7@85.25,87.675
SOP0: C34.1 P1.18 P3.6 R7.2 U1.35 | length 63.4
  Top Layer w0.15: v2(100.25,110.3) R7.2@100.25,111.95 ; P3.6@102,84.905 102,83.575 102.675,82.9 108.149,82.9 109.016,82.033 v3(109.45,82.033)
  Signal Layer 1 w0.15: v3(109.45,82.033) 109.321,82.162 109.321,82.824 109.968,83.471 110.399,83.471 113.029,86.101 113.029,87.471 v7(112.55,87.95)
  Signal Layer 2 w0.15: v2(100.25,110.3) 100.744,109.806 109.18,109.806 111.4,107.586 111.4,100.175 v3(110.725,99.5) ; v3(116.025,88.6) v3(116.025,93.55)
  Bottom Layer w0.15: C34.1@107.975,87.95 v7(110.025,87.95) 115.375,87.95 v3(116.025,88.6) ; v3(110.725,99.5) 111.675,98.55 114.343,98.55 116.025,96.868 v3(116.025,93.55)
  Bottom Layer w0.2: U1.35@100.25,109.5 v2@100.25,110.3
SOP1: R6.2 U1.34 | length 2.4
  Top Layer w0.15: v2(99.75,111) R6.2@99.75,111.95
  Bottom Layer w0.15: U1.34@99.75,109.5 v2(99.75,111)
SOP2: C33.1 D1.2 P1.15 P4.6 R5.2 R61.1 U1.21 | length 74.8
  Top Layer w0.15: D1.2@83.232,110.4 88.5,110.4 92.025,106.875 94.075,106.875 v2(97.7,103.25) 98.756,102.194 98.756,99.172 102.453,95.475 v2(102.7,95.475) ; v3(94.9,83.075) 96,84.175 P4.6@96,84.905
  Signal Layer 1 w0.15: v3(104.775,93.275) 104.875,93.175 v3(104.875,87.225)
  Signal Layer 2 w0.15: v3(94.9,83.075) 96.392,81.583 109.636,81.583 112.05,83.996 112.05,84.3 113.029,85.279 113.029,88.971 v1(112.55,89.45)
  Bottom Layer w0.15: v2(97.7,103.25) U1.21@98.5,103.25 ; v2(102.7,95.475) 103.317,94.858 R61.1@104.075,94.858 ; R5.2@104.075,95.6 R61.1@104.075,94.858 ; v3(104.775,93.275) 104.775,94.158 R61.1@104.075,94.858 ; v3(104.875,87.225) 104.885,87.215 107.091,87.215 107.5,87.624 107.5,88.475 C33.1@107.975,88.95 108.475,89.45 P1.15@111,89.45 v1(112.55,89.45)
SPARE1: P1.16 | length 1.8
  Bottom Layer w0.15: 110.025,88.95 P1.16@111,88.95 P1.16@110.825,88.95
  Bottom Layer w0.35: 110.125,88.95 ccw(c110.025,88.95) 110.125,88.95
SSPI_CLK: R17.2 TP14.1 U1.11 U2.6 | length 38.2
  Top Layer w0.15: TP14.1@85.2,84.5 v3(86.7,84.5) ; R17.2@89.4,89.2 89.8,89.2 90.425,89.825 90.874,89.825 91.534,90.485 v1(92.6,90.485)
  Signal Layer 1 w0.15: v3(86.7,84.5) 87.505,83.695 89.563,83.695 93.094,87.227 93.094,89.991 v1(92.6,90.485)
  Signal Layer 2 w0.15: v1(92.6,90.485) 92.106,89.991 92.106,89.01 92.395,88.721 95.053,88.721 96.675,90.342 v3(96.675,94)
  Bottom Layer w0.15: v1(92.6,90.485) U2.6@93.675,90.485 ; v3(96.675,94) 96.939,94 97.389,94.45 97.635,94.45 101.75,98.565 U1.11@101.75,100.5
  Bottom Layer w0.35: 101.85,99 ccw(c101.75,99) 101.85,99
SSPI_MISO: TP7.1 U1.13 U2.2 | length 46.8
  Top Layer w0.15: TP7.1@85.2,81.6 v3(86.7,81.6)
  Signal Layer 1 w0.15: v3(86.7,81.6) 88.288,81.6 91.778,85.09 98.725,85.09 101.756,88.12 101.756,91.261 v1(102.25,91.755) 102.25,92.044 103.465,93.259 103.465,93.818 102.668,94.615 100.815,94.615 99.637,93.437 95.463,93.437 v3(94.9,94)
  Bottom Layer w0.15: v3(94.9,94) 95.164,94 96.189,95.025 97.432,95.025 100.75,98.343 U1.13@100.75,100.5 ; U2.2@101.175,91.755 v1(102.25,91.755)
  Bottom Layer w0.35: 100.85,99 ccw(c100.75,99) 100.85,99
SSPI_MOSI: R18.2 TP13.1 U1.12 U2.5 | length 31.7
  Top Layer w0.15: TP13.1@85.2,85.95 v3(86.7,85.95) ; R18.2@90.625,89.2 90.64,89.215 v1(92.6,89.215)
  Signal Layer 1 w0.15: v3(86.7,85.95) 86.7,85.832 88.547,83.985 89.443,83.985 92.6,87.142 v1(92.6,89.215)
  Signal Layer 2 w0.15: v1(92.6,89.215) 94.14,89.215 95.635,90.71 95.635,93.835 v3(95.8,94)
  Bottom Layer w0.15: v1(92.6,89.215) U2.5@93.675,89.215 ; v3(95.8,94) 96.525,94.725 97.521,94.725 101.25,98.454 U1.12@101.25,100.5
  Bottom Layer w0.35: 101.35,99.7 ccw(c101.25,99.7) 101.35,99.7
SSPI_SEL: R12.2 TP6.1 U1.14 U2.1 | length 45.1
  Top Layer w0.15: TP6.1@85.2,83.05 v3(86.7,83.05) ; v2(100.25,99.7) 100.25,98.801 103.65,95.401 103.65,93.444 103.231,93.025 v1(102.25,93.025)
  Signal Layer 1 w0.15: v3(86.7,83.05) 89.328,83.05 91.658,85.38 98.605,85.38 101.466,88.241 101.466,91.67 102.25,92.454 v1(102.25,93.025)
  Bottom Layer w0.15: R12.2@92.6,94.975 95.525,94.975 96.025,95.475 97.472,95.475 100.25,98.253 v2(100.25,99.7) U1.14@100.25,100.5 ; U2.1@101.175,93.025 v1(102.25,93.025)
USB_DM: P1.12 P4.1 R29.1 R62.2 | length 33.6
  Top Layer w0.15: v3(91.005,81.095) P4.1@92,81.095
  Signal Layer 2 w0.15: v3(91.005,81.095) 91.005,82.654 94.576,86.225 102.55,86.225 106.025,89.7 108.183,89.7 109.433,90.95 v1(109.5,90.95)
  Bottom Layer w0.15: R29.1@104,87.75 104.025,87.725 R62.2@106,87.725 ; R62.2@106,87.733 105.825,87.908 105.825,88.581 108.194,90.95 v1(109.5,90.95) P1.12@111,90.95
USB_DP: P1.13 P4.5 R30.1 R64.2 | length 26.4
  Top Layer w0.15: P4.5@96,81.095 v3(96,82.775)
  Signal Layer 2 w0.15: v3(96,82.775) 99.16,85.935 102.649,85.935 106.139,89.425 108.297,89.425 109.322,90.45 v1(110.2,90.45)
  Bottom Layer w0.15: v3(96,82.775) 96.45,82.325 99.886,82.325 101.05,83.489 R64.2@101.05,84.267 R64.2@101.05,84.275 ; v1(110.2,90.45) P1.13@111,90.45
USB_ID: P1.14 P4.2 | length 36.9
  Top Layer w0.15: P4.2@92,84.905 92,83.05 92.021,83.029 v3(92.029,83.029)
  Signal Layer 2 w0.15: v3(92.029,83.029) 94.414,80.645 110.07,80.645 113.575,84.15 113.575,89.4 113.025,89.95 v1(109.5,89.95)
  Bottom Layer w0.15: v1(109.5,89.95) P1.14@111,89.95
USB_RXD: P2.6 Q2.1 U1.57 U5.3 | length 41
  Top Layer w0.15: U5.3@98.45,92.875 98.45,93.325 99.125,94 v3(99.4,94) ; v3(107.375,91.525) 107.375,87.375 108,86.75 P2.6@108,84.905 v3(108,83.35)
  Signal Layer 1 w0.15: v3(107.375,91.525) 106.589,91.525 106.325,91.789 106.325,92.161 107.739,93.575 107.811,93.575 109.18,94.944 109.18,97.755 109.725,98.3 109.725,104.025 v2(109,104.75)
  Signal Layer 2 w0.15: v3(99.4,94) 100.96,92.44 106.946,92.44 107.375,92.011 v3(107.375,91.525)
  Bottom Layer w0.15: Q2.1@103.99,83.85 107.5,83.85 v3(108,83.35) ; U1.57@107.5,104.75 v2(109,104.75)